# Altium PCB PCB_2000W.PcbDoc
Units mil, origin at the board's own origin, x right, y up, seen from the top; angles counter-clockwise.
Board outline 5555 x 2721.71 mil, 2 copper layers (Top Layer, Bottom Layer); 31 components, 16 nets, 160 pads, 14 vias.
Unrouted connection lines stored in the file: 5.
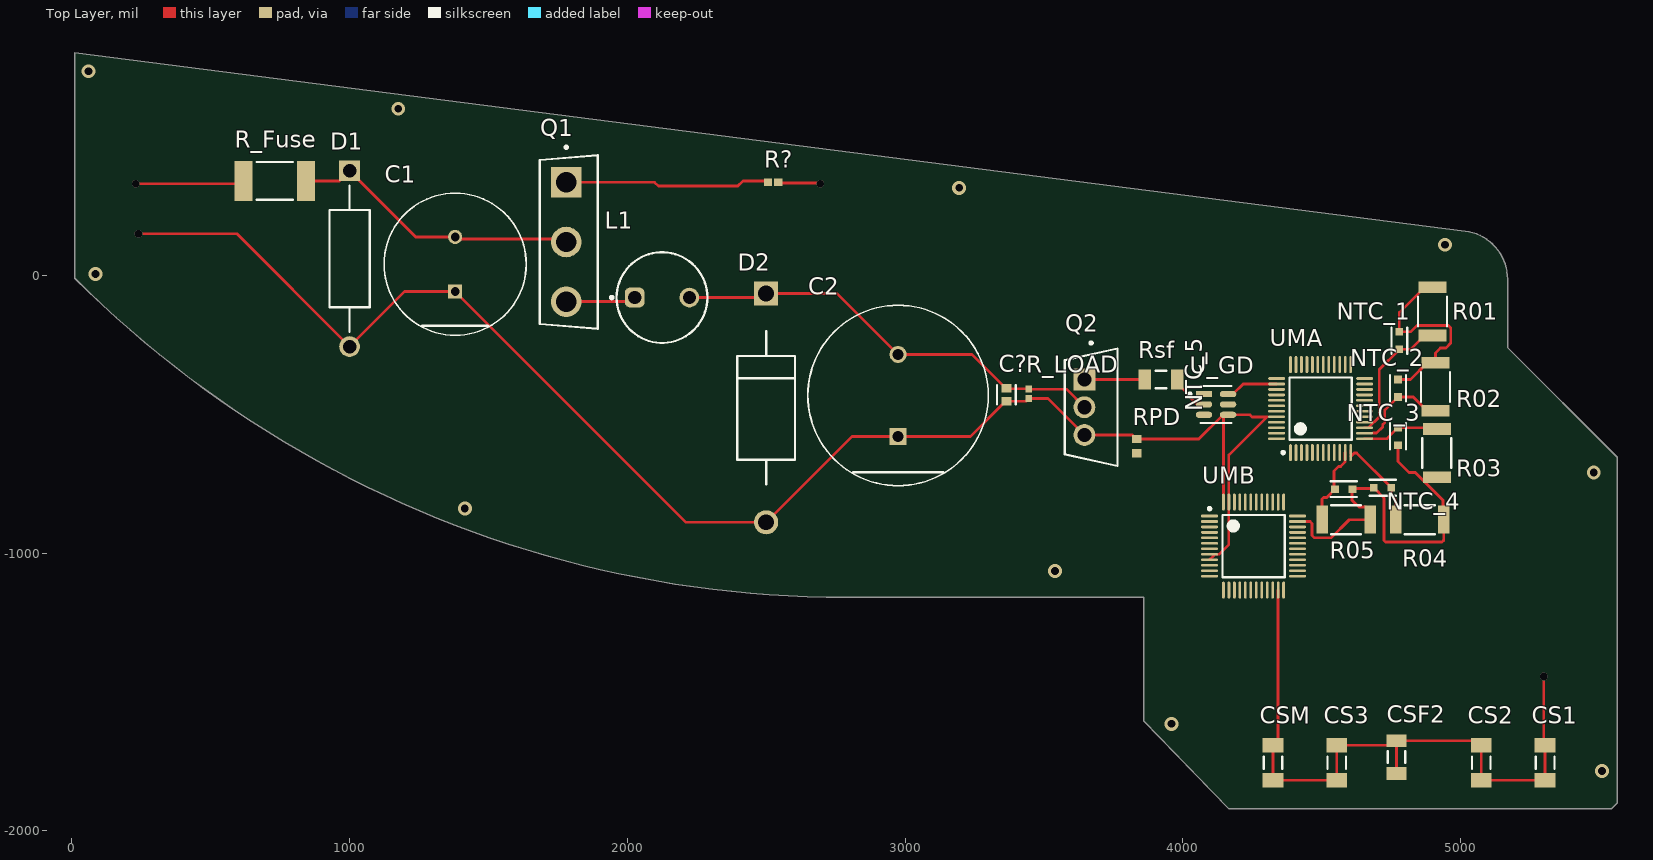
[diagram p0: Top Layer view]
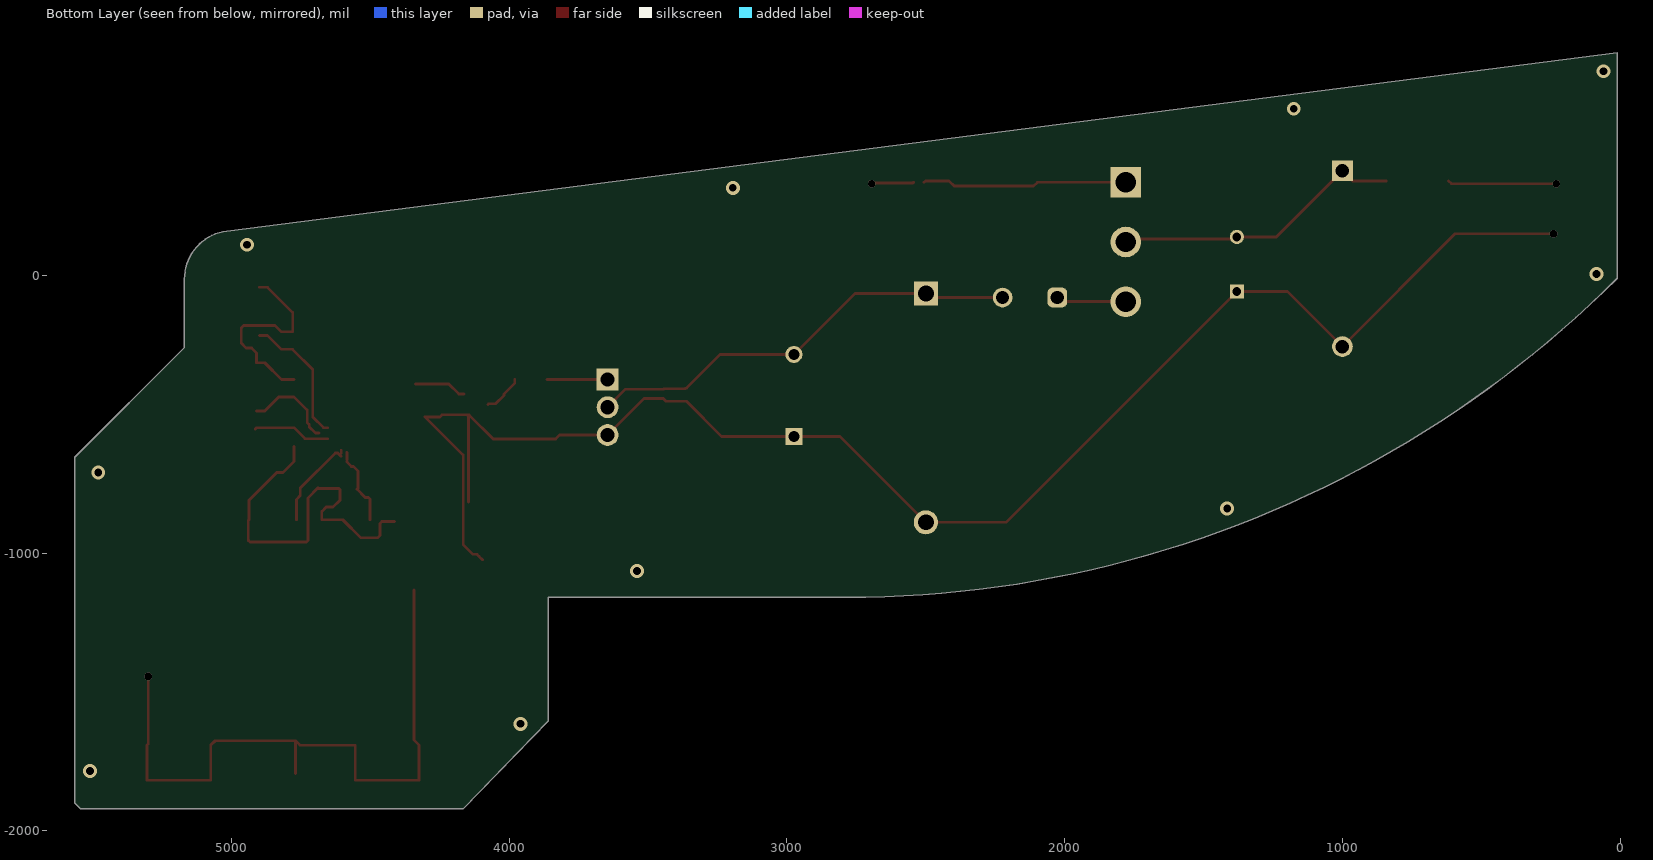
[diagram p1: Bottom Layer view, seen from below]
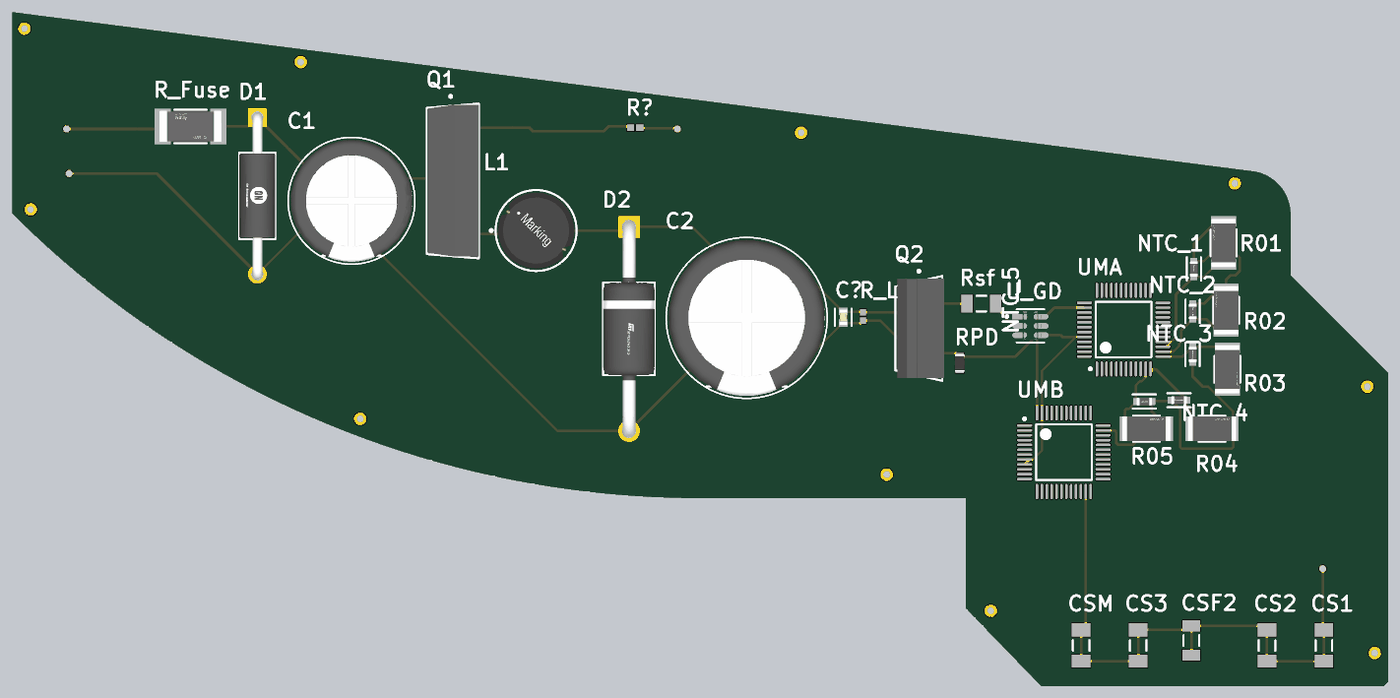
[diagram p2: 3D render of the assembled board from above, using the file's embedded part models]

## Layer stack, top to bottom
Top Solder: solder mask 0.4, Solder Resist, Dk 3.5
Top Layer: signal copper 1.4
Dielectric 1: dielectric 12.6, FR-4, Dk 4.8
Bottom Layer: signal copper 1.4
Bottom Solder: solder mask 0.4, Solder Resist, Dk 3.5

## Board outline
5545,-1920 5565,-1900 5565,-655 5170,-260 5170,-14.33 ccw(c4994.9,-14.33) 5017.18,159.34 10,801.71 10,-10.28 ccw(c2785.68,2765.4) 2785.68,-1160 3860,-1160 3860,-1605 4165,-1920

## Design rules (kind name [scope] priority, off if disabled: settings)
Clearance [All] p1: gap=0 ignorepadtopadclearanceinfootprint=FALSE
PolygonConnect [All] p1: connectstyle=Relief reliefconductorwidth=10 reliefentries=4 polygonreliefangle="90 Angle" airgapwidth=10
RoutingVias [All] p1: holewidth=28 width=50 viastyle="Through Hole" minholewidth=28 minwidth=50 maxholewidth=28 maxwidth=50
SilkToSilkClearance [All] p1: silktosilkclearance=1
SolderMaskExpansion [All] p1: expansion=4 istentingtop=FALSE
SupplyNets "Schematic Supply Nets" [InNet('GND')] p1: voltage=0.000
Width [All] p1: maxlimit=10 minlimit=10 preferedwidth=10
29 further rules are at their usual default settings.

## Components (designator, comment, footprint, x,y, rotation, side; value= is the part's Value field where it differs from the comment)
C1 "EEUFR1H471" FP-RAD-TH-D_12_5_0_5-L_20-MFG 1380,40 r90 top value=470uF
C2 "EEUFR1H102" FP-RAD-TH-D_16_0_5-L_25_2-MFG 2975,-432.64 r90 top value=1mF
C? "C0603C104K5RACTU" FP-C0603C-CF-MFG 3365,-430 r270 top value="0.10 μF"
CS1 "CAP 100nF 10V 1206(3216)" CAPC1206(3216)100_M 5305,-1755 r90 top value=100nF
CS2 "CAP 100nF 10V 1206(3216)" CAPC1206(3216)100_M 5075,-1755 r90 top value=100nF
CS3 "CAP 100nF 10V 1206(3216)" CAPC1206(3216)100_M 4555,-1755 r90 top value=100nF
CSF2 "CAP 1.2uF 16V 1206(3216)" CAPC1206(3216)110_N 4770,-1735 r90 top value=1.2uF
CSM "CAP 100nF 10V 1206(3216)" CAPC1206(3216)100_M 4325,-1755 r90 top value=100nF
D1 "P6KE36CA" FP-17-02-CA-MFG 1000,60 r270 top
D2 "1N5822" FP-DO-201AD-MFG 2500,-477.2 r270 top
L1 "7447720100" WE-TI_8095 2125,-80 r0 top
NTC_1 "ERT-J1VG103FA" FP-ERTJ1-MFG 4780,-235 r270 top
NTC_2 "ERT-J1VG103FA" FP-ERTJ1-MFG 4775,-406.5 r270 top
NTC_3 "ERT-J1VG103FA" FP-ERTJ1-MFG 4775,-580 r90 top
NTC_4 "ERT-J1VG103FA" FP-ERTJ1-MFG 4720,-765 r0 top
NTC_5 "ERT-J1VG103FA" FP-ERTJ1-MFG 4580,-770 r180 top
Q1 "IRFP4568PBF" FP-PG-TO247-3-MFG 1788.96,120 r0 top
Q2 "IRF1407PBF" FP-PG-TO220-3-MFG 3670,-475 r0 top
R01 "CR2010-JW-103ELF" FP-CR2010-IPC_C 4900,-130 r90 top
R02 "CR2010-JW-103ELF" FP-CR2010-IPC_C 4910,-401.66 r90 top
R03 "CR2010-JW-103ELF" FP-CR2010-IPC_C 4915,-640 r270 top
R04 "CR2010-JW-103ELF" FP-CR2010-IPC_C 4853.34,-880 r0 top
R05 "CR2010-JW-103ELF" FP-CR2010-IPC_C 4588.34,-880 r0 top
R? "MC00625W0402139R" RESC1005X40X25ML10T10 2525,335 r180 top
R_Fuse "WSL2512R0500FEA" FP-WSL2512-MFG 730,340 r0 top value=50mΩ
R_LOAD "MC00625W040219R10" RESC1005X40X25NL10T10 3445,-426.73 r90 top
RPD "ERJ3EKF1002V" RESC1609X55X30LL15T15 3835,-615 r90 top value=10KOhm
Rsf "SG73P2BTTD22R0F" RESC3216X70X40NL20T20 3921.93,-375 r180 top
U_GD "UCC27511ADBVR" FP-DBV0006A-IPC_B 4120,-465 r0 top
UMA "STM32F103C8T6" STM-LQFP48_L 4496.54,-479.84 r90 top
UMB "STM32F103C8T6" STM-LQFP48_L 4255,-975 r0 top

## Footprints (in the part's own frame and the unit in brackets; to place one, negate y for a bottom-side part, rotate by r counter-clockwise, add the part's x,y. Pads: shape width x height; smd on the part's side, far side on the other; paste and mask are expansions set on the pad)
CAPC1206(3216)100_M [mm] "Chip Capacitor, Body 3.2x1.6mm, Height 1mm, IPC Low Density"
  rect 1.35x1.9 smd: 1(-1.6,0) 2(1.6,0)
  silkscreen extent -0.55,-0.85 0.55,0.85, body extent -1.7,-0.9 1.7,0.9, height 1
CAPC1206(3216)110_N [mm] "Chip Capacitor, Body 3.2x1.6mm, Height 1.1mm, IPC Medium Density"
  rect 1.15x1.8 smd: 1(-1.5,0) 2(1.5,0)
  silkscreen extent -0.55,-0.8 0.55,0.8, body extent -1.7,-0.9 1.7,0.9, height 1.1
FP-17-02-CA-MFG [mm]
  rect 1.9x1.9 hole 1.25 paste-2539.97 mask+0: 1(-8.042,0)
  round 1.9 hole 1.25 paste-2539.97 mask+0: 2(8.042,0)
  silkscreen extent -6.69,-1.84 6.69,1.84, body extent -9.09,-1.94 9.09,1.94, height 0.25
FP-C0603C-CF-MFG [mm]
  rect 0.75x0.9 smd paste+0 mask+0: 1(-0.6,0) 2(0.6,0)
  silkscreen extent -0.87,-0.85 0.88,0.85, body extent -1.2,-0.6 1.2,0.6, height 0.25
FP-CR2010-IPC_C [mil]
  rect 41.56x100.72 smd paste+0 mask+0: 1(-86.66,0) 2(86.66,0)
  silkscreen extent -54,-52 54,52, body extent -111,-56 111,56, height 10
FP-DBV0006A-IPC_B [mm]
  rect 1.505x0.57 smd paste+0 mask+0: 1(-1.1,0.95)
  rrect100% 1.505x0.57 smd paste+0 mask+0: 2(-1.1,0) 3(-1.1,-0.95) 4(1.1,-0.95) 5(1.1,0) 6(1.1,0.95)
  silkscreen extent -2.53,-1.7 1.4,1.7, body extent -2.1,-1.7 2.1,1.7, height 0.25
FP-DO-201AD-MFG [mm]
  rect 2.2x2.2 hole 1.45 paste-2539.97 mask+0: 1(-10.47,0)
  round 2.2 hole 1.45 paste-2539.97 mask+0: 2(10.47,0)
  silkscreen extent -7,-2.65 7,2.65, body extent -11.67,-2.75 11.67,2.75, height 0.25
FP-ERTJ1-MFG [mm]
  rect 0.7x0.7 smd paste+0 mask+0: 1(-0.8,0) 2(0.8,0)
  silkscreen extent -1.2,-0.72 1.2,0.72, body extent -1.25,-0.55 1.25,0.55, height 0.25
FP-PG-TO220-3-MFG [mm]
  rect 2x2 hole 1.3 paste-2539.97 mask+0: 1(-0.61,2.54)
  round 2 hole 1.3 paste-2539.97 mask+0: 2(-0.61,0) 3(-0.61,-2.54)
  silkscreen extent -2.41,-5.38 2.41,6, body extent -2.51,-5.6 2.51,5.6, height 0.25
FP-PG-TO247-3-MFG [mm]
  rect 2.8x2.8 hole 1.85 paste-2539.97 mask+0: 1(-0.228,5.46)
  round 2.8 hole 1.85 paste-2539.97 mask+0: 2(-0.228,0) 3(-0.228,-5.46)
  silkscreen extent -2.66,-7.94 2.66,8.8, body extent -2.76,-8.16 2.76,8.16, height 0.25
FP-RAD-TH-D_12_5_0_5-L_20-MFG [mm]
  rect 1.3x1.3 hole 0.8 paste-2539.97 mask+0: 1(-2.5,0)
  round 1.3 hole 0.8 paste-2539.97 mask+0: 2(2.5,0)
  silkscreen extent -6.5,-6.5 6.5,6.5, body extent -6.6,-6.6 6.6,6.6, height 0.25
FP-RAD-TH-D_16_0_5-L_25_2-MFG [mm]
  rect 1.55x1.55 hole 1 paste-2539.97 mask+0: 1(-3.75,0)
  round 1.55 hole 1 paste-2539.97 mask+0: 2(3.75,0)
  silkscreen extent -8.25,-8.25 8.25,8.25, body extent -8.35,-8.35 8.35,8.35, height 0.25
FP-WSL2512-MFG [mm]
  rect 1.65x3.68 smd paste+0 mask+0: 1(-2.855,0) 2(2.855,0)
  silkscreen extent -1.66,-1.72 1.66,1.72, body extent -3.78,-1.94 3.78,1.94, height 0.25
RESC1005X40X25ML10T10 [mm] "Chip Resistor, 2-Leads, Body 1.00x0.50mm, IPC Low Density"
  rect 0.75x0.7 smd: 1(-0.475,0) 2(0.475,0)
  body extent -0.55,-0.3 0.55,0.3, height 0.4
RESC1005X40X25NL10T10 [mm] "Chip Resistor, 2-Leads, Body 1.00x0.50mm, IPC Medium Density"
  rect 0.65x0.6 smd: 1(-0.425,0) 2(0.425,0)
  body extent -0.55,-0.3 0.55,0.3, height 0.4
RESC1609X55X30LL15T15 [mm] "Chip Resistor, 2-Leads, Body 1.75x0.95mm, IPC High Density"
  rect 0.75x0.85 smd: 1(-0.65,0) 2(0.65,0)
  body extent -0.87,-0.48 0.87,0.48, height 0.55
RESC3216X70X40NL20T20 [mm] "Chip Resistor, 2-Leads, Body 3.20x1.60mm, IPC Medium Density"
  rect 1.15x1.8 smd: 1(-1.475,0) 2(1.475,0)
  silkscreen extent -0.5,-0.8 0.5,0.8, body extent -1.7,-0.9 1.7,0.9, height 0.7
STM-LQFP48_L [mm] "QFP, 48-Leads, Body 7x7mm, Pitch 0.5mm, IPC High Density"
  oval 1.55x0.25 smd: 1(-4.025,2.75) 2(-4.025,2.25) 3(-4.025,1.75) 4(-4.025,1.25) 5(-4.025,0.75) 6(-4.025,0.25) 7(-4.025,-0.25) 8(-4.025,-0.75) 9(-4.025,-1.25) 10(-4.025,-1.75) 11(-4.025,-2.25) 12(-4.025,-2.75) 25(4.025,-2.75) 26(4.025,-2.25) 27(4.025,-1.75) 28(4.025,-1.25) 29(4.025,-0.75) 30(4.025,-0.25) 31(4.025,0.25) 32(4.025,0.75) 33(4.025,1.25) 34(4.025,1.75) 35(4.025,2.25) 36(4.025,2.75)
  oval 0.25x1.55 smd: 13(-2.75,-4.025) 14(-2.25,-4.025) 15(-1.75,-4.025) 16(-1.25,-4.025) 17(-0.75,-4.025) 18(-0.25,-4.025) 19(0.25,-4.025) 20(0.75,-4.025) 21(1.25,-4.025) 22(1.75,-4.025) 23(2.25,-4.025) 24(2.75,-4.025) 37(2.75,4.025) 38(2.25,4.025) 39(1.75,4.025) 40(1.25,4.025) 41(0.75,4.025) 42(0.25,4.025) 43(-0.25,4.025) 44(-0.75,4.025) 45(-1.25,4.025) 46(-1.75,4.025) 47(-2.25,4.025) 48(-2.75,4.025)
  silkscreen extent -4.15,-2.85 2.85,3.55, body extent -3.5,-3.5 3.5,3.5, height 1.6
WE-TI_8095 [mm] "Radial Leaded Wire Wound Inductor, body diameter 7.8mm"
  rrect50% 1.8x1.8 hole 1.2: 1(-2.5,0)
  round 1.8 hole 1.2: 2(2.5,0)
  silkscreen extent -4.72,-4.15 4.15,4.15, body extent -5.52,-5.52 5.52,5.52, height 9.55

## Part data
C1: library part CMP-05427-001062-1, "Aluminum Electrolytic Capacitors (Radial Lead Type) 470uF ±20% 50V", Capacitance=470uF, Case/Package=Radial, ESR (Equivalent Series Resistance)=22mR, Max Operating Temperature=105°C, Min Operating Temperature=-40°C, Package Quantity=200, Ripple Current=2.26A, Tolerance=20%, Voltage=50V, Construction=RADIAL, Diameter=12.5mm, Features="General Purpose", Height=20mm, Height - Seated (Max)=0.787inch, Impedance=22mR, Lead Diameter=0.6mm, Lead Free="Lead Free", Lead Pitch=5mm, Lead/Base Style=Straight, Length=20mm, Life (Hours)=10000Hour, Mount="Through Hole", Number of Pins=2, Packaging=Bulk, Radiation Hardening=No, Ripple Current (AC)=2.26A, RoHS Compliant=Yes, Series=FR, Termination=Radial, Voltage Rating=50V, Voltage Rating (DC)=50V
C2: library part CMP-05427-000625-1, "Aluminum Electrolytic Capacitors (Radial Lead Type) 1000uF ±20% 50V", Capacitance=1mF, Case/Package=Radial, Dielectric Material=Aluminium, ESR (Equivalent Series Resistance)=16mR, Max Operating Temperature=105°C, Min Operating Temperature=-40°C, Package Quantity=100, Ripple Current=3.32A, Tolerance=20%, Voltage=50V, Construction=RADIAL, Diameter=16mm, Height=25mm, Height - Seated (Max)=1.063inch, Impedance=16mR, Lead Diameter=0.8mm, Lead Free="Lead Free", Lead Pitch=7.5mm, Lead/Base Style=Straight, Length=25mm, Life (Hours)=10000Hour, Mount="Through Hole", Number of Pins=2, Packaging=Bulk, Polarity=Polar, Radiation Hardening=No, Ripple Current (AC)=3.32A, RoHS Compliant=Yes, Series=FR, Termination=Radial, Voltage Rating=50V, Voltage Rating (DC)=50V
C?: library part CMP-2006-03061-2, "CAP CER 0.1UF 50V X7R 0603", Capacitance="0.10 μF", Manufacturer=KEMET, Package=C0603C-CF, Temperature="-55°C to +125°C", Temperature Characteristic=X7R, Temperature Coefficient=30ppm/°C, Temperature Range High=+125°C, Temperature Range Low=-55°C, Tolerance=0.1, Voltage Rating="50 V", Automotive=Yes, Automotive Grade="Grade 1", Category=Cap, ComponentLink2Description=Datasheet, ComponentLink2URL=https://api.kemet.com/component-edge/download/datasheet/C0603C100J5GACAUTO.pdf, Device Class L1="Passive Components", Device Class L2=Capacitors, Device Class L3="Ceramic Capacitors", Digikey Description="CAP CER 0.1UF 50V X7R 0603", Height=0.87mm, Lead Free=Yes, Manufacturer Part Number=C0603C104K5RACTU, Material=Ceramic, Octopart=https://octopart.com/c0603c104k5ractu-kemet-139244, RoHS=TRUE
CS1 CS2 CS3 CSM: library part CMP-1037-04172-1, "CAP 100nF 10V ±5% 1206 (3216 Metric) Thickness 1mm SMD", Case-EIA=1206, Case-Metric=3216, Rated Voltage="10 V", Tolerance=Â±5%, Max Thickness="1 mm", Technology=SMT
CSF2: library part CMP-1037-04737-1, "CAP 1.2uF 16V ±10% 1206 (3216 Metric) Thickness 1.1mm SMD", Case-EIA=1206, Case-Metric=3216, Rated Voltage="16 V", Tolerance=Â±10%, Max Thickness="1.1 mm", Technology=SMT
D1: library part CMP-00278-84409643-1, "P6KE36CA Fairchild P6KE36CA, Bi-Directional TVS Diode, 600W, 2-Pin DO-15", Breakdown Voltage=34.2V, Capacitance=1.6pF, Case/Package=Axial, Clamping Voltage=49.9V, Leakage Current=5µA, Max Breakdown Voltage=37.8V, Max Junction Temperature (Tj)=175°C, Max Power Dissipation=600W, Max Surge Current=12A, Min Operating Temperature=-55°C, Operating Supply Voltage=30.8V, Power Line Protection=No, Test Current=1mA, Voltage Rating (DC)=36V, Composition=Zener, Diameter=3.56mm, Direction=Bidirectional, Element Configuration=Single, Height=3.68mm, Lead Free="Lead Free", Length=7.62mm, Max Operating Temperature=175°C, Max Reverse Leakage Current=5µA, Min Breakdown Voltage=34.2V, Mount="Through Hole", NexarPartId=84409643, Number of Bidirectional Channels=1, Number of Channels=1, Number of Elements=1, Number of Pins=2, Peak Pulse Current=12A, Peak Pulse Power=600W, Polarity=Bidirectional, Power Rating=600W, Radiation Hardening=No, REACH SVHC="No SVHC", Reverse Breakdown Voltage=34.2V, Reverse Standoff Voltage=30.8V, RoHS=Compliant, Termination=Axial, Weight=300mg, Width=3.56mm
D2: library part CMP-12187-000025-1, "DIODE SCHOTTKY 40V 3A DO201AD", Forward Current=3A, Manufacturer=STMicroelectronics, Max Junction Temp=+150°C, Max Repetitive Reverse Voltage=40V, Max Surge Forward Current=80A, Package=DO-201AD, Peak Reverse Current=2mA, Automotive=No, Category=Diode, ComponentLink2Description=Datasheet, ComponentLink2URL=https://www.st.com/resource/en/datasheet/1n5822.pdf, Device Class L1="Discrete Semiconductors", Device Class L2=Diodes, Device Class L3="Schottky Diodes", Digikey Description="DIODE SCHOTTKY 40V 3A DO201AD", Height=5.3mm, Lead Free=Yes, Manufacturer Part Number=1N5822, Mouser Description="Schottky Diodes & Rectifiers Vr/40V Io/3A BULK", Octopart=https://octopart.com/1n5822-stmicroelectronics-323225, RoHS=TRUE, Temperature Range High=+150°C
L1: library part CMP-03913-110288125-2, "7447720100 Inductor, 10Uh, Unshielded, 3.5A, Rad Rohs Compliant: Yes", Ambient Temperature Range High=85°C, Ambient Temperature Range Low=-40°C, Current Rating=3.5A, DC Resistance (DCR)=30mΩ, Inductance=10µH, Max Operating Temperature=125°C, Voltage Rating=80V, Height=9.5mm, Length=7.8mm, Min Operating Temperature=-40°C, NexarPartId=110288125, RoHS=Compliant, Width=7.8mm
NTC_1 NTC_2 NTC_3 NTC_4 NTC_5: library part CMP-05419-000001-1, "THERMISTOR NTC 10KOHM 3380K 0603", Case Code (Imperial)=0603, Case Code (Metric)=1608, Max Operating Temperature=125°C, Max Power Dissipation=100mW, Min Operating Temperature=-40°C, Package Quantity=4000, Resistance=10kR, Resistance Tolerance=1%, Accuracy=1%, Case/Package=0603, Depth=0.8mm, Height=0.8mm, Lead Free="Lead Free", Length=1.6mm, Mount="Surface Mount", Number of Pins=2, Packaging="Tape and Reel", Power Rating=100mW, Radiation Hardening=No, REACH SVHC="No SVHC", RoHS Compliant=Yes, Series=ERT-J, Termination=SMD/SMT, Tolerance=1%, Width=800um
Q1: library part CMP-32901-000093-1, "MOSFET N-CH 150V 171A TO-247AC", Continuous Drain Current=171A, Drain To Source Breakdown Voltage=150V, Drain To Source Resistance=4.8mΩ, Gate To Source Voltage=30V, Input Capacitace At Vds="10470pF @ 50V", Manufacturer=Infineon, Max Forward Diode Voltage=1.3V, Max Junction Temp=+175°C, Package=PG-TO247-3, Power Dissipation=517W, Pulse Drain Current=684A, Temperature="-55°C to +175°C", Temperature Range Low=-55°C, Automotive=No, Category=Trans, ComponentLink2Description=Datasheet, ComponentLink2URL=https://www.infineon.com/dgdl/irfp4568pbf.pdf?fileId=5546d462533600a40153562c7c32201b, Depletion Mode=False, Device Class L1="Discrete Semiconductors", Device Class L2=Transistors, Device Class L3=MOSFETs, Digikey Description="MOSFET N-CH 150V 171A TO-247AC", Drain To Source Voltage=150V, Footprint Url=https://www.infineon.com/cms/en/product/packages/PG-TO247/PG-TO247-3-901/, Gate Charge At Vgs="151nC @ 10V", Height=24.99mm, Lead Free=Yes, Manufacturer Part Number=IRFP4568PBF, Number of Channels=1, Number Of N Channels=1, Octopart=https://octopart.com/irfp4568pbf-infineon-65874045, Reverse Recovery Charge=515nC, Reverse Recovery Time=110ns, RoHS=TRUE, Rthja Max=40°C/W, Standoff Height=3.71mm, Temperature Range High=+175°C, Threshold Vgs Max=5V, Threshold Vgs Min=3V, Turn Off Delay Time=47ns, Turn On Delay Time=27ns
Q2: library part CMP-32901-000505-1, "MOSFET N-CH 75V 130A TO-220AB", Case/Package=TO-220, Continuous Drain Current (ID)=130A, Drain To Source Breakdown Voltage=75V, Drain To Source Resistance=7.8mR, Gate to Source Voltage (Vgs)=20V, Input Capacitance=5.6nF, Max Operating Temperature=175°C, Max Power Dissipation=330W, Min Operating Temperature=-55°C, Threshold Voltage=4V, Drain to Source Voltage (Vdss)=75V, Element Configuration=Single, Halogen Free="Halogen Free", Height=0.65inch, Lead Free="Lead Free", Length=0.42inch, Max Dual Supply Voltage=75V, Mount="Through Hole", Number of Pins=3, Packaging=Rail/Tube, Power Dissipation=330W, Rds On Max=7.8mR, REACH SVHC="No SVHC", RoHS Compliant=Yes, Turn-Off Delay Time=150ns, Turn-On Delay Time=11ns, Width=0.19inch
R01 R02 R03 R04 R05: library part CMP-07231-003456-1, "Thick Film Chip Resistors 2010 10kΩ 0.5W 5% 200ppm/°C", Case Code (Imperial)=2010, Case Code (Metric)=5025, Max Operating Temperature=155°C, Min Operating Temperature=-55°C, Package Quantity=4000, Power Rating=500mW, Resistance=10kR, Temperature Coefficient=200ppm/°C, Tolerance=5%, Voltage Rating=200V, Case/Package=2010, Composition="Thick Film", Contact Plating=Tin, Height=0.6mm, Length=5mm, Mount="Surface Mount", Packaging="Tape and Reel", Radiation Hardening=No, Termination=SMD/SMT, Width=2.5mm
R?: library part CMP-2002-06169-1, Manufacturer=Multicomp, Part Number=MC00625W0402139R
R_Fuse: library part CMP-2000-07420-2, "RES 0.05 OHM 1% 1W 2512", 3DS Part Number=110-00001, Manufacturer=Vishay, Package=WSL2512, Power Rating=1W, Resistance=50mΩ, Temperature="-65°C to +170°C", Temperature Coefficient=75ppm/°C, Temperature Range High=+170°C, Temperature Range Low=-65°C, Tolerance=1%, Automotive=Yes, Automotive Grade="Grade 0", Category=Res, ComponentLink2Description=Datasheet, ComponentLink2URL=http://www.vishay.com/docs/30100/wsl.pdf, Composition="Metal Element", Device Class L1="Passive Components", Device Class L2=Resistors, Device Class L3="Chip SMD Resistors", Digikey Description="RES 0.05 OHM 1% 1W 2512", Height=0.889mm, Ipc Land Pattern Name=RESC635318X64, Lead Free=Yes, Manufacturer Part Number=WSL2512R0500FEA, Octopart=https://octopart.com/wsl2512r0500fea-vishay-39744678, RoHS=TRUE, Series=WSL
R_LOAD: library part CMP-2002-06389-1, Manufacturer=Multicomp, Part Number=MC00625W040219R10
RPD: library part CMP-1012-00623-3, "Chip Resistor, 10 KOhm, +/- 1%, 0.1 W, -55 to 155 degC, 0603 (1608 Metric), RoHS, Tape and Reel", Case Code (Imperial)=0603, Case Code (Metric)=1608, Manufacturer=Panasonic, Max Operating Temperature=155degC, Max Power Dissipation=100mW, Min Operating Temperature=-55degC, Package Description="2-Pin Surface Mount Device, Body 1.6 x 0.85 mm", Package Quantity=1, Package Reference=603, Resistance=10KOhm, Temperature Coefficient=100ppm\/degreesC, Tolerance=1%, Voltage Rating=75V, Case\/Package=0603, Composition=ThickFilm, Contact Plating=Tin, Datasheet URL=https://industrial.panasonic.com/cdbs/www-data/pdf/RDA0000/AOA0000C304.pdf, Datasheet Version=02/2017, Depth=0.8mm, Height=0.45mm, Lead Free=LeadFree, Length=1.6mm, Manufacturer URL=http://www.panasonic.com/, Military Standard=Not, Mount=SurfaceMount, Mounting Technology=SurfaceMount, Number of Pins=2, Number of Terminations=2, Packaging=TapeandReel, Power Rating=100mW, Radiation Hardening=No, REACH SVHC=NoSVHC, RoHSCompliant=true, Termination=SMD/SMT, Voltage Rating (DC)=75V, Width=0.031inch
Rsf: library part CMP-2003-01707-1, Manufacturer="KOA Speer", Part Number=SG73P2BTTD22R0F
U_GD: library part CMP-04912-000035-1, "IC GATE DRVR LOW-SIDE SOT23-6", Case/Package=SOT-23-6, Max Operating Temperature=140°C, Max Output Current=8A, Min Operating Temperature=-40°C, Channel Type=Single, Mount="Surface Mount", Number of Channels=1, Number of Drivers=1, Packaging="Tape and Reel", RoHS Compliant=Yes
UMA UMB: library part CMP-0237-00215-3, "ARM Cortex-M3 32-bit MCU, 64 KB Flash, 20 KB Internal RAM, 37 I/Os, 48-pin LQFP, -40 to 85 degC, Tray", I/Os (High Current)=37, Operating Frequency(F) (Processor speed) (MHz)=72, Supply Voltage(Vcc) min (V)=2, A/D Converter="2x12-bit (10 Channel)", ComponentLink1Description="Manufacturer URL", ComponentLink1URL=http://www.st.com/web/en/home.html, ComponentLink2Description=Datasheet, ComponentLink2URL=http://www.st.com/st-web-ui/static/active/en/resource/technical/document/datasheet/CD00161566.pdf, ComponentLink3Description="Package Specification", ComponentLink3URL=http://www.st.com/st-web-ui/static/active/en/resource/technical/document/datasheet/DM00058181.pdf, Core="ARM Cortex-M3", DatasheetVersion="Rev. 16", FLASH Size (Prog) (kB)=64, Internal RAM Size (kB)=20, Mounting Technology="Surface Mount", PackageDescription="48-Pin Low Profile Quad Flat Package, 7 x 7 mm Body, 0.5 mm Pitch", PackageReference=LQFP48, PackageVersion="Rev. 6, 06/2013", Packing=Tray, PartNumber=STM32F103C8T6

## Via types
v1: diameter 50, hole 28, Top Layer to Bottom Layer, 10 vias
v2: diameter 28, hole 28, Top Layer to Bottom Layer, 4 vias

## Nets (pads, with @x,y where several pads share a name; then routed paths per layer and width w, separated by ;. In a path a pad name is that pad's centre, name@x,y a point inside that pad or via, vN(x,y) a via of type N, cw(c..) or ccw(c..) an arc to the next point about the centre after c; other vN are vias at no path point)
GND: C1.1 C2.1 C?.2 CS1.1 CS1.2 CS2.1 CS2.2 CS3.1 CS3.2 CSF2.1 CSF2.2 CSM.1 CSM.2 D1.2 D2.2 NTC_1.1 NTC_2.1 NTC_3.1 NTC_4.1 NTC_5.1 Q2.3 R01.2 R02.2 R03.2 R04.2 R05.2 R_LOAD.1 RPD.2 U_GD.4 UMA.44 UMB.8 UMB.9 UMB.23 UMB.24 UMB.35 UMB.36 UMB.47 UMB.48 | length 10457.8
  Top Layer w10: v2(240,150) 593.39,150 D1.2 1198.19,-58.43 C1.1 2210.98,-889.41 D2.2 2809.13,-580.28 C2.1 3235.39,-580.28 3362.05,-453.62 C?.2 3435.83,-453.62 3445,-444.45 R_LOAD.1 3514.45,-443.46 Q2.3 3818.62,-575 3833.03,-589.41 RPD.2 4057.9,-589.41 4144.91,-502.4 U_GD.4@4152.48,-502.4 ; UMB.9 4096.54,-1024.13 4108.68,-1011.99 4108.68,-1011.83 4115.75,-1004.76 4130.38,-1004.76 4166.18,-968.96 4166.18,-647.18 4303.36,-510 ; UMB.48 4146.73,-508.14 U_GD.4@4152.48,-502.4 ; 4304.23,-509.13 4303.99,-509.37 4303.36,-510 ; UMB.23 4343.58,-1673.43 CSM.2 CSM.1 CS3.1 CS3.2 4753.94,-1692.01 CSF2.2 ; UMB.35 4458.98,-886.42 4465.89,-893.33 4465.89,-936.57 4474.68,-945.36 4534.27,-945.36 4599.63,-880 R05.2 4675,-850.42 4659.22,-834.64 4634.64,-834.64 4610,-810 4610,-771.5 NTC_5.1 4614,-767.5 4686,-767.5 NTC_4.1 4725,-801.5 4725,-954.14 4730.86,-960 4934.14,-960 4940,-954.14 4940,-882.52 4937.48,-880 4937.48,-810 4837.48,-710 4815,-710 4775,-670 NTC_3.1@4775,-616.5 ; CSF2.1 CSF2.2 ; NTC_2.1 4820.42,-375 4880.42,-315 R02.2 4910,-279.22 4927.78,-261.44 4947.58,-261.44 4965.36,-243.66 4965.36,-189.67 4956.57,-180.88 4843.43,-180.88 4820.81,-203.5 NTC_1.1 4780,-133.76 4870.42,-43.34 R01.2 ; v2(5300,-1445) 5300,-1687.01 CS1.2 CS1.1 CS2.1 CS2.2 5058.94,-1675.94 CSF2.2 ; U_GD.4@4152.48,-502.4 U_GD.4 4242.44,-502.4 4250.04,-510 4303.36,-510
NetC1_2: C1.2 D1.1 Q1.2 R_Fuse.2 | length 1059.1
  Top Layer w10: R_Fuse.2 963.39,340 D1.1 1238.19,138.43 C1.2 1387.88,130.55 1769.45,130.55 Q1.2
NetC2_2: C2.2 C?.1 D2.1 L1.2 Q2.2 R_LOAD.2 | length 1598.6
  Top Layer w10: L1.2 2485,-80 D2.1 2755,-65 C2.2 3240.67,-285 3362.05,-406.38 C?.1 3366.81,-408.19 3443.19,-408.19 R_LOAD.2 3580.98,-410 Q2.2
NetL1_1: L1.1 Q1.3 | length 252.8
  Top Layer w10: Q1.3 1781.12,-93.84 2012.74,-93.84 L1.1
NetNTC_1_2: NTC_1.2 R01.1 UMA.15 | length 483.1
  Top Layer w10: UMA.15 4666.77,-548.74 4667.01,-548.5 4669.63,-548.5 4707.81,-510.33 4707.81,-338.69 NTC_1.2 4820.59,-266.5 4870.42,-216.66 R01.1
NetNTC_2_2: NTC_2.2 R02.1 UMA.14 | length 330.6
  Top Layer w10: UMA.14@4685.24,-568.11 4697.99,-568.11 4720.51,-545.59 4720.51,-536.99 4727.81,-529.7 4727.81,-485.19 NTC_2.2 4830.09,-437.99 4880.42,-488.33 R02.1
NetNTC_3_2: NTC_3.2 R03.1 UMA.13 | length 278.4
  Top Layer w10: UMA.13 4735.39,-588.11 NTC_3.2 4910.17,-548.5 R03.1
NetNTC_4_2: NTC_4.2 R04.1 UMA.12 | length 335.3
  Top Layer w10: UMA.12@4605.04,-651.83 4617.73,-639.14 4619.14,-639.14 4620,-640 4626.5,-640 NTC_4.2 4753.04,-766.55 4753.04,-793.78 4766.67,-807.41 R04.1 ; UMA.12@4605.07,-629.97 4605.12,-630.02 UMA.12@4605.12,-640.12
NetNTC_5_2: NTC_5.2 R05.1 UMA.11 | length 285.1
  Top Layer w10: R05.1 4501.67,-805.86 4507.53,-800 4518.5,-800 NTC_5.2 4545,-766.5 4545,-705 4561.31,-688.69 4568.81,-688.69 4584.88,-672.62 4584.88,-670 ; UMA.11@4584.88,-665.12 4584.88,-638.54 UMA.11
NetQ1_1: Q1.1 R?.2 | length 741.8
  Top Layer w10: Q1.1 2098.19,334.96 2111.93,321.22 2397.64,321.22 2416.42,340 2501.3,340 R?.2
NetQ2_1: Q2.1 Rsf.2 | length 217.9
  Top Layer w10: Q2.1 Rsf.2
NetR11_1: R_Fuse.1 | length 391.7
  Top Layer w10: v2(230,330) 607.6,330 R_Fuse.1
NetR11_2: U_GD.1
NetR?_1: R?.1 | length 153.4
  Top Layer w10: R?.1 2546.2,332.5 2692.5,332.5 v2(2695,330)
NetRsf_1: Rsf.1 U_GD.2 | length 144.5
  Top Layer w10: Rsf.1 3980,-387.8 4019.23,-427.03 4019.23,-432.22 4049.64,-462.62 4074.29,-462.62 U_GD.2
NetU_GD_6: U_GD.6 UMA.38 | length 189.8
  Top Layer w10: U_GD.6 4181.74,-427.6 4218.08,-391.26 UMA.38
pads on no net: RPD.1 U_GD.3 U_GD.5 UMA.1 UMA.2 UMA.3 UMA.4 UMA.5 UMA.6 UMA.7 UMA.8 UMA.9 UMA.10 UMA.16 UMA.17 UMA.18 UMA.19 UMA.20 UMA.21 UMA.22 UMA.23 UMA.24 UMA.25 UMA.26 UMA.27 UMA.28 UMA.29 UMA.30 UMA.31 UMA.32 UMA.33 UMA.34 UMA.35 UMA.36 UMA.37 UMA.39 UMA.40 UMA.41 UMA.42 UMA.43 UMA.45 UMA.46 UMA.47 UMA.48 UMB.1 UMB.2 UMB.3 UMB.4 UMB.5 UMB.6 UMB.7 UMB.10 UMB.11 UMB.12 UMB.13 UMB.14 UMB.15 UMB.16 UMB.17 UMB.18 UMB.19 UMB.20 UMB.21 UMB.22 UMB.25 UMB.26 UMB.27 UMB.28 UMB.29 UMB.30 UMB.31 UMB.32 UMB.33 UMB.34 UMB.37 UMB.38 UMB.39 UMB.40 UMB.41 UMB.42 UMB.43 UMB.44 UMB.45 UMB.46
copper on no net:
  other v1: 5510,-1785 3960,-1615 3540,-1065 1415,-840 5480,-710 85,5 4945,110 3195,315 1175,600 60,735